# Altium PCB TRX_2.PcbDoc
Units mm, origin at the board's own origin, x right, y up, seen from the top; angles counter-clockwise.
Board outline 99.7 x 69.9 mm, 2 copper layers (Top, Bottom); 83 components, 64 nets, 277 pads, 36 vias.
Unrouted connection lines stored in the file: 1.
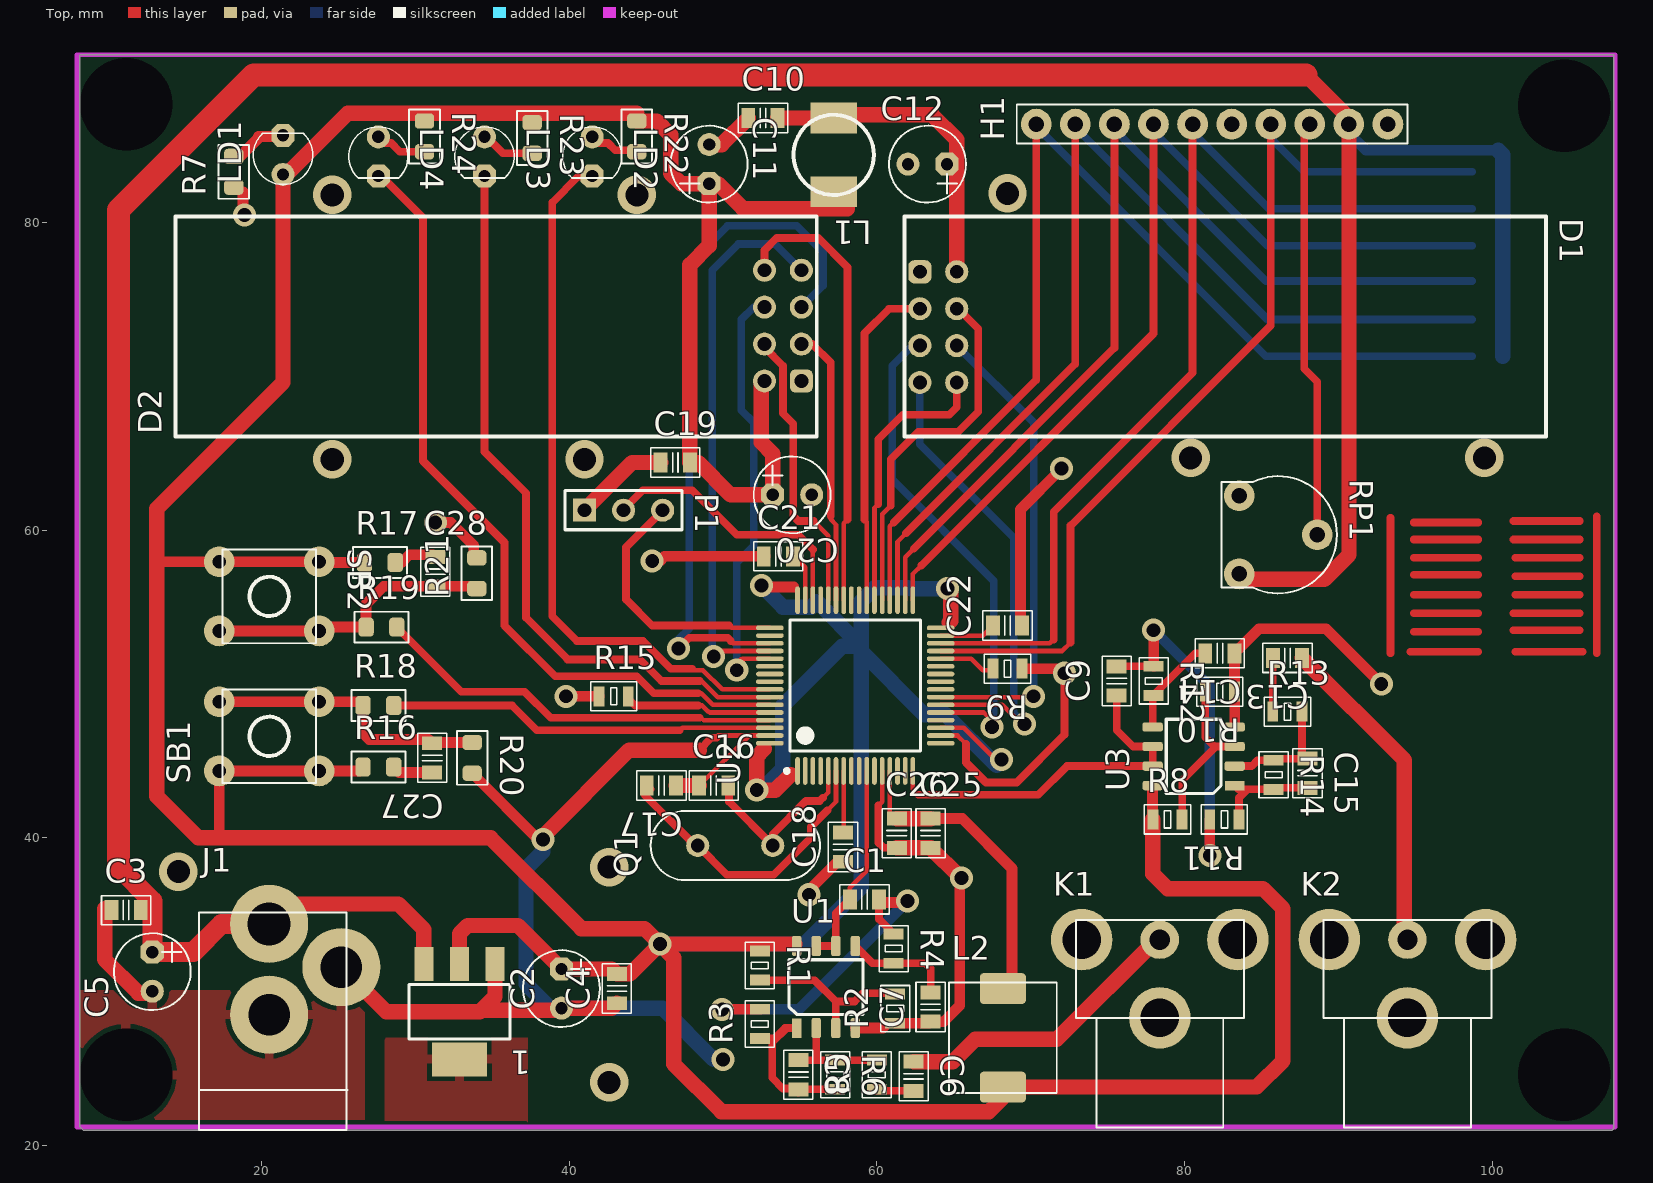
[diagram p0: Top view]
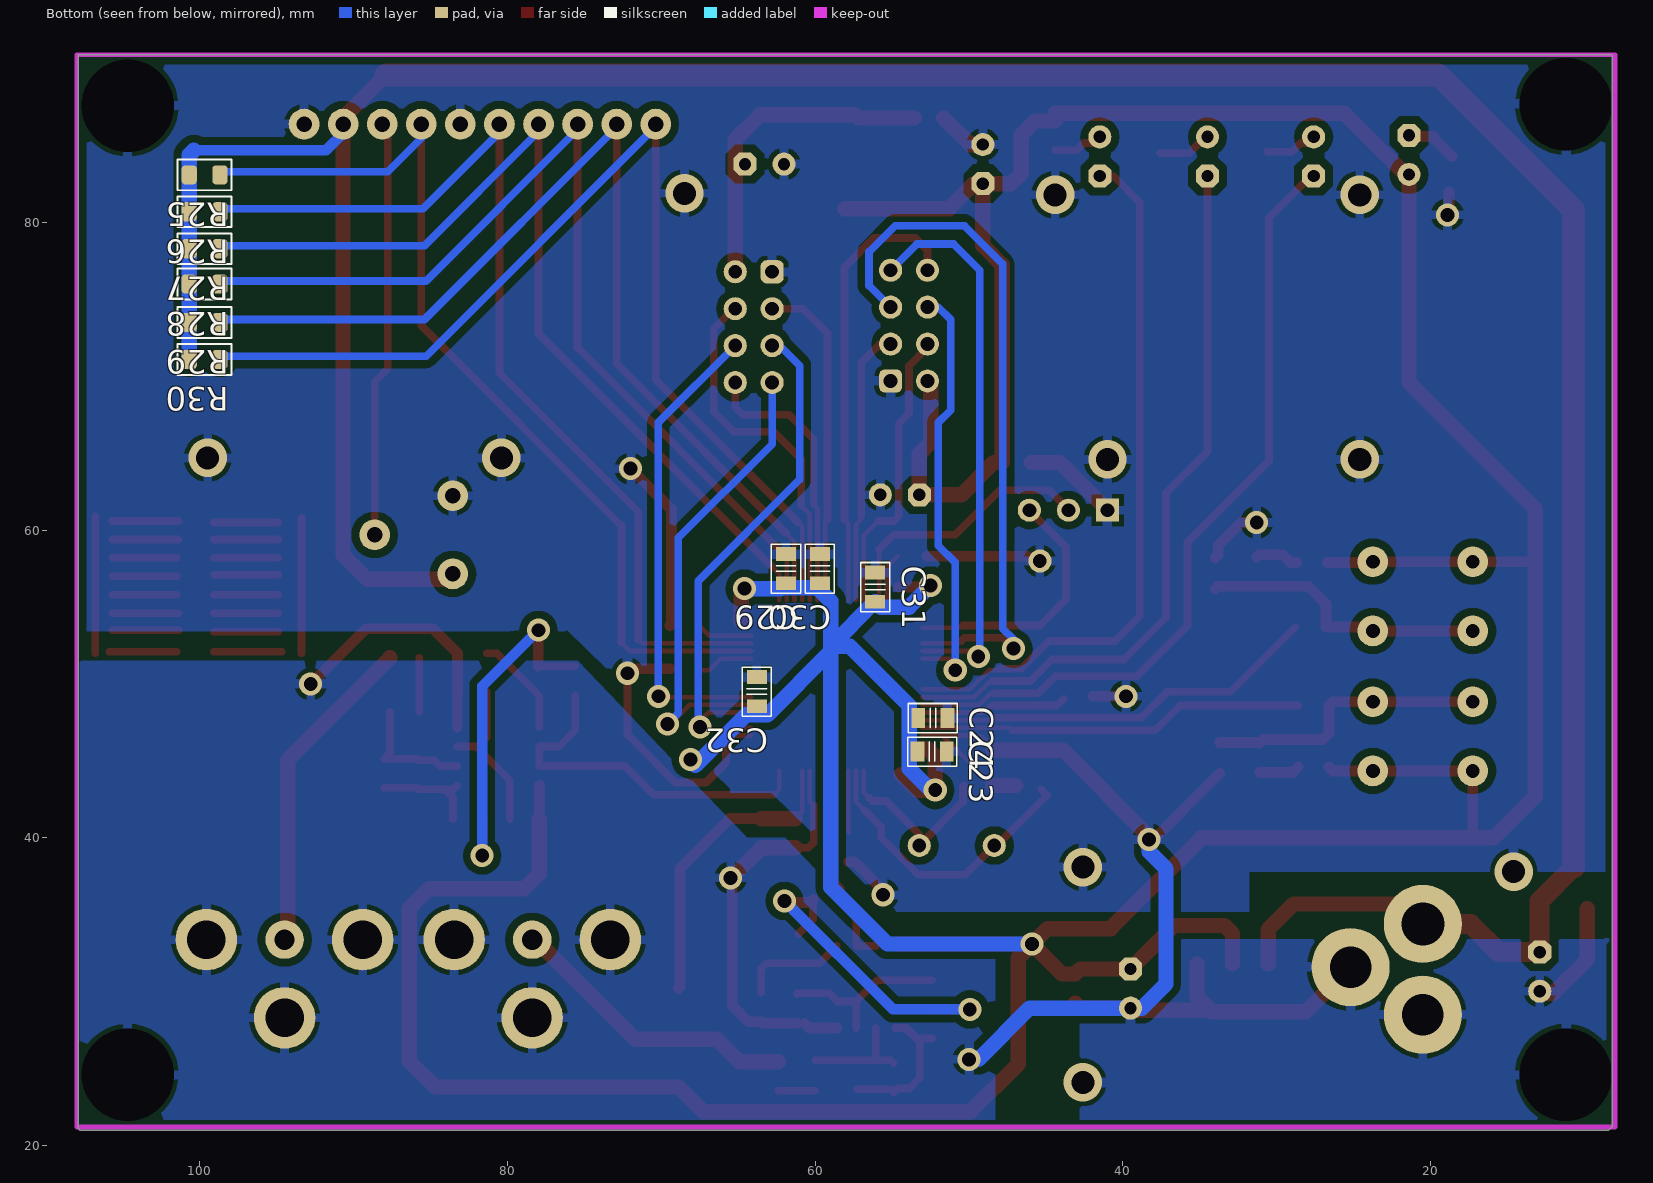
[diagram p1: Bottom view, seen from below]
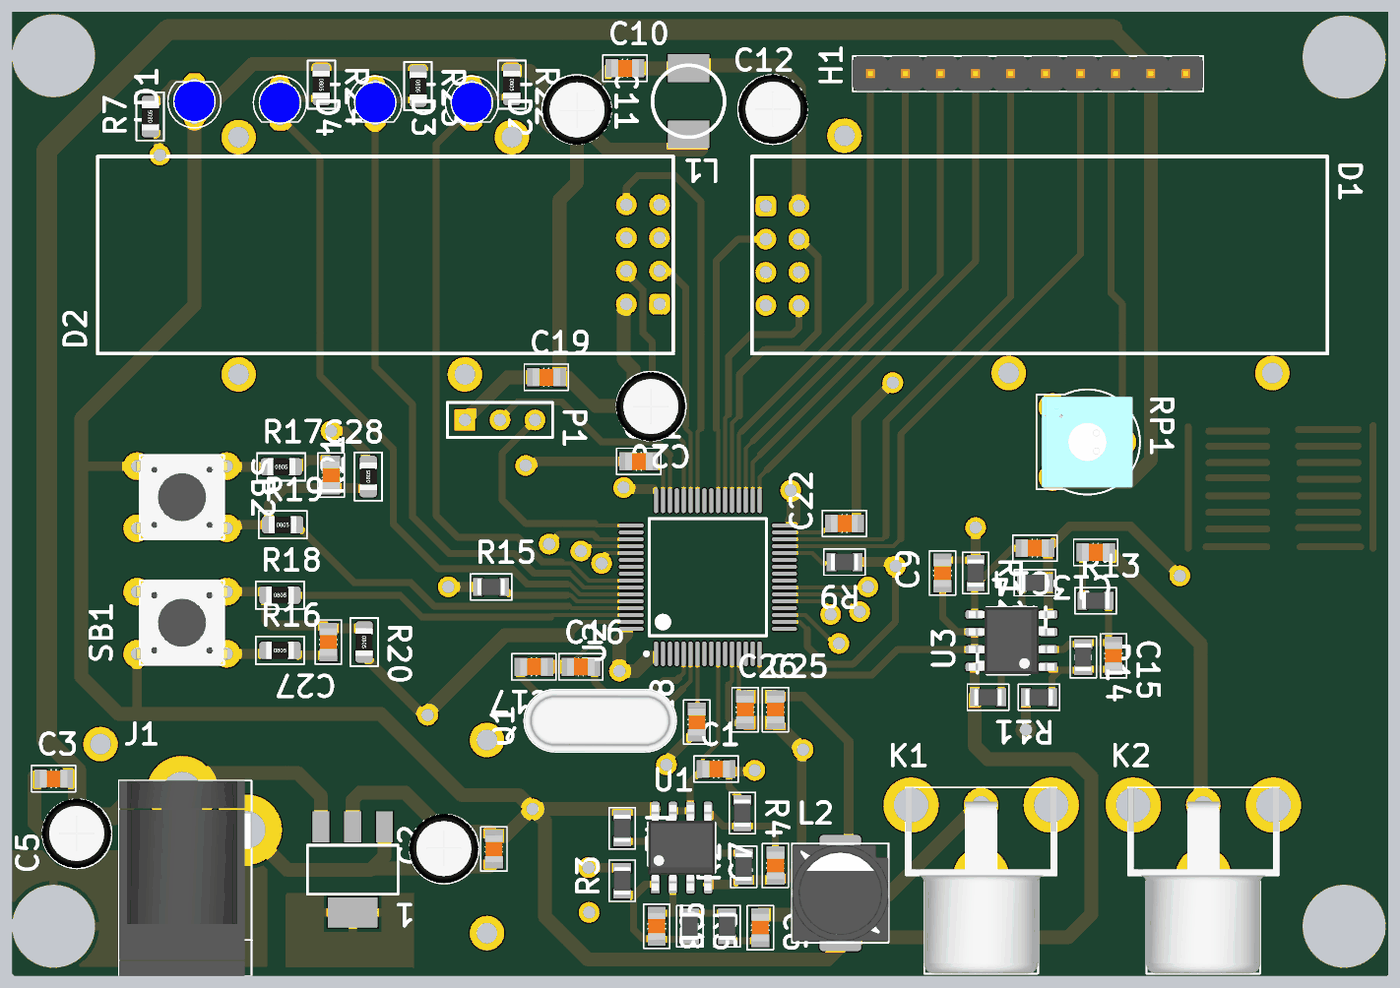
[diagram p2: 3D render of the assembled board from above, using the file's embedded part models]
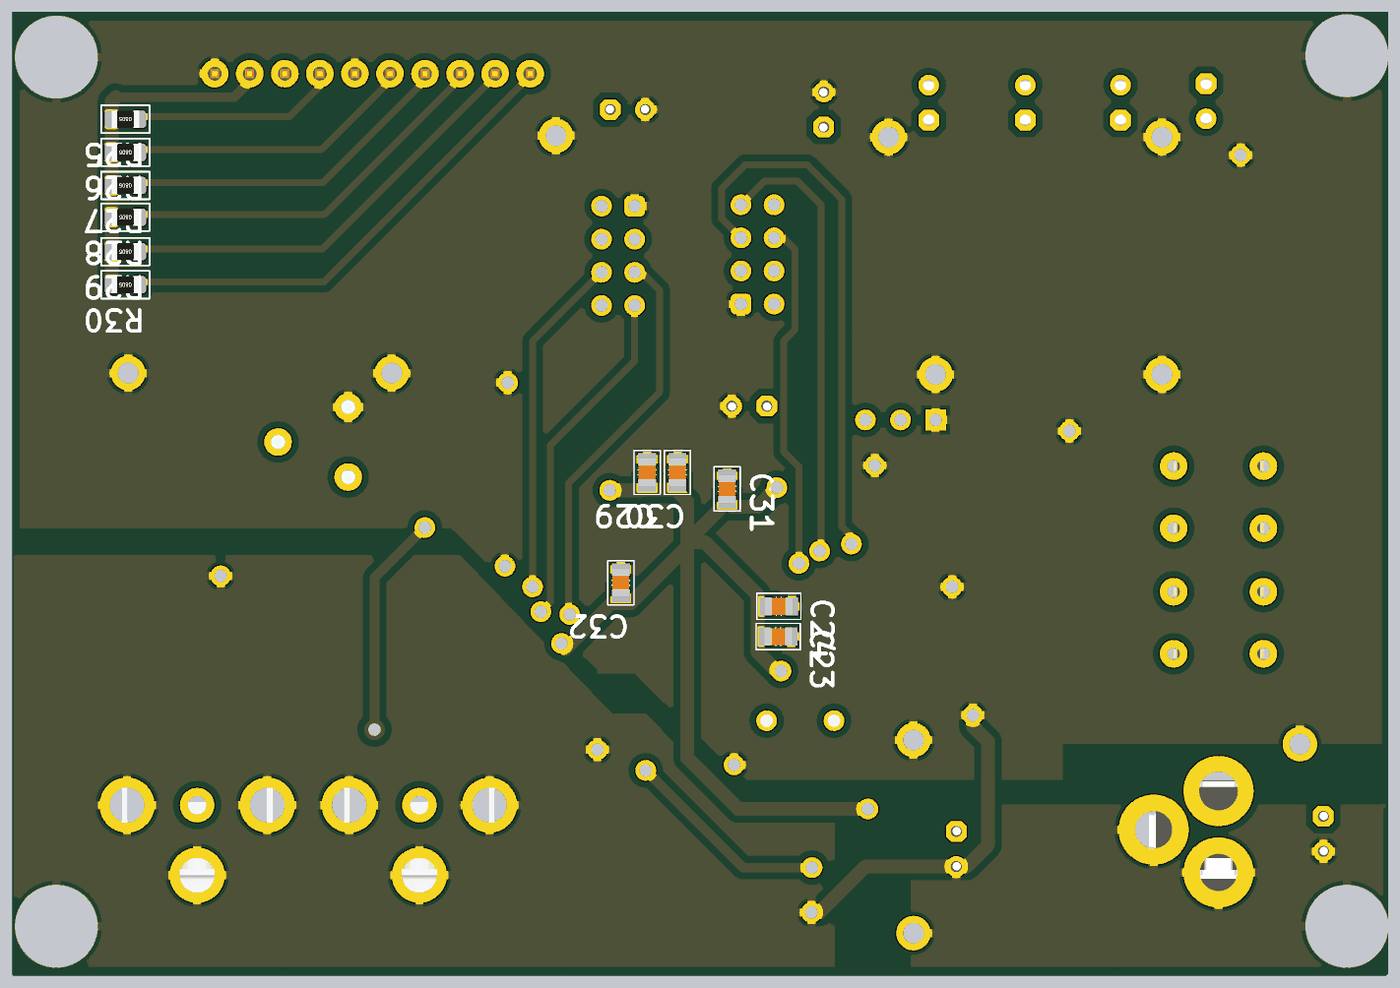
[diagram p3: 3D render of the assembled board from below, using the file's embedded part models]

## Layer stack, top to bottom
Top Solder: solder mask 0.0102, Solder Resist, Dk 3.5
Top: signal copper 0.0356
Dielectric 1: dielectric 0.32, FR-4, Dk 4.8
Bottom: signal copper 0.0356
Bottom Solder: solder mask 0.0102, Solder Resist, Dk 3.5

## Board outline
8.4,21 8.2,21.2 8.2,90.9 107.9,90.9 107.9,21.1 107.8,21 8.5,21

## Design rules (kind name [scope] priority, off if disabled: settings)
Clearance Clearance_poly_0.5 [InPolygon   And Not  InNet('VCC 3.3V')] p1: gap=0.5
Clearance Clearance_U3_0.1mm [(ObjectKind = 'Pad') And (Component = 'U2')] p2: gap=0.15
Clearance Clearance_GND_PWR_0.7mm [(InNet('GND') OR InNet('VCC 3.3V'))] p3: gap=0.2
Clearance [All] p4: gap=0.2
HoleSize [All] p1: absolutevalues=TRUE maxlimit=10 minlimit=0.025 maxpercent=80.000 minpercent=20.000
PolygonConnect [All] p1: connectstyle=Relief reliefconductorwidth=0.6 reliefentries=4 polygonreliefangle="90 Angle" airgapwidth=0.3
RoutingVias [All] p1: holewidth=0.3 width=0.5 viastyle="Through Hole" minholewidth=0.2 minwidth=0.45 maxholewidth=10 maxwidth=10
SolderMaskExpansion [All] p1: expansion=0.102
Width 3.3V_GND [(InNet('GND') OR InNet('VCC 3.3V') OR InNet('VCC 5V'))] p1: maxlimit=1.3 minlimit=0.2 preferedwidth=1
Width [All] p2: maxlimit=1.5 minlimit=0.2 preferedwidth=0.3
28 further rules are at their usual default settings.

## Components (designator, comment, footprint, x,y, rotation, side; value= is the part's Value field where it differs from the comment)
1 "AMS1117-3.3" SOT-223_AMS1117-3.3(Primary) 32.8,28.7 r180 top
C1 "100nF" C_0805 59.2,36 r0 top
C2 "100u" El-d5-h11-F2.54 39.5,30.2 r90 top
C3 "100nF" C_0805 11.2,35.3 r0 top
C4 "100nF" C_0805 43.1,30.2 r90 top
C5 "100u" El-d5-h11-F2.54 12.9,31.3 r90 top
C6 "100nF" C_0805 62.4,24.5 r270 top
C7 "100nF" C_0805 63.5,29 r90 top
C8 "100nF" C_0805 54.9,24.6 r270 top
C9 "100nF" C_0805 75.6,50.2 r90 top
C10 "100nF" C_0805 52.6,86.8 r0 top
C11 "100u" El-d5-h11-F2.54 49.1,83.8 r270 top
C12 "100u" El-d5-h11-F2.54 63.3,83.8 r0 top
C13 "100nF" C_0805 86.7,51.7 r180 top
C14 "100nF" C_0805 82.3,52 r180 top
C15 "100nF" C_0805 88,44.2 r270 top
C16 "20pF" C_0805 49.4,43.4 r0 top
C17 "20pF" C_0805 46,43.4 r180 top
C18 "100nF" C_0805 57.8,39.4 r90 top
C19 "100nF" C_0805 46.9,64.4 r0 top
C20 "100u" El-d5-h11-F2.54 54.5,62.3 r180 top
C21 "2.2uF" C_0805 53.6,58.3 r0 top
C22 "2.2uF" C_0805 68.5,53.8 r180 top
C23 "1uF" C_0805 52.4,45.6 r180 bottom
C24 "100nF" C_0805 52.358,47.784 r180 bottom
C25 "1uF" C_0805 63.5,40.3 r90 top
C26 "100nF" C_0805 61.3,40.3 r90 top
C27 "100nF" C_0805 31.1,45.2 r270 top
C28 "100nF" C_0805 31.3,57.3 r90 top
C29 "4.7uF" C_0805 61.9,57.5 r270 bottom
C30 "100nF" C_0805 59.7,57.5 r270 bottom
C31 "100nF" C_0805 56.1,56.3 r270 bottom
C32 "100nF" C_0805 63.8,49.5 r270 bottom
D1 "nrf24L01_modul" 24L01-2x4 62.8,76.8 r0 top
D2 "nrf24L01_modul" 24L01-2x4 55.1,69.7 r180 top
H1 "HD44780" J1x10 81.8,86.4 r180 top
J1 "Power-Jack" Power-Jack 20.5,20.8 r90 top
K1 "Chinch Mono-2" "Chinch Mono - 2" 78.4,28.3 r0 top
K2 "Chinch Mono-2" "Chinch Mono - 2" 94.5,28.3 r0 top
L1 "L_SMD_5mm" L_SMD_4.8 57.2,82 r180 top
L2 "33u" Dr-SD-75 68.2,27 r0 top
LD1 "Led" "Led d3mm Blue" 21.4,84.4 r90 top
LD2 "Led" "Led d3mm Blue" 41.5,84.3 r270 top
LD3 "Led" "Led d3mm Blue" 34.5,84.3 r270 top
LD4 "Led" "Led d3mm Blue" 27.6,84.3 r270 top
P1 "SWD" HDR1X3 41,61.3 r0 top
Q1 "8MHz" HC49S 50.8,39.5 r180 top
R1 "0" R_0805 52.4,31.7 r270 top
R2 "0" R_0805 61.2,28.9 r90 top
R3 "0" R_0805 52.4,27.9 r90 top
R4 "0" R_0805 61.1,32.8 r270 top
R5 "0" R_0805 60,24.6 r90 top
R6 "0" R_0805 57.3,24.6 r270 top
R7 "300" R0805 18.2,83.3 r90 top
R8 "0" R_0805 78.9,41.2 r0 top
R9 "0" R_0805 68.5,51 r180 top
R10 "0" R_0805 82.3,49.5 r180 top
R11 "0" R_0805 82.6,41.2 r180 top
R12 "0" R_0805 78,50.2 r270 top
R13 "0" R_0805 86.7,48.2 r0 top
R14 "0" R_0805 85.8,44.1 r270 top
R15 "0" R_0805 42.9,49.2 r0 top
R16 "100" R0805 27.6,44.6 r0 top
R17 "100" R0805 27.7,57.9 r0 top
R18 "330" R0805 27.6,48.6 r0 top
R19 "330" R0805 27.8,53.7 r0 top
R20 "330" R0805 33.7,45.2 r270 top
R21 "330" R0805 34,57.2 r90 top
R22 "300" R0805 44.4,85.6 r270 top
R23 "300" R0805 37.6,85.5 r270 top
R24 "300" R0805 30.6,85.6 r270 top
R25 "4.7k" R0805 99.7,83.1 r0 bottom
R26 "4.7k" R0805 99.7,80.7 r0 bottom
R27 "4.7k" R0805 99.7,78.3 r0 bottom
R28 "4.7k" R0805 99.7,76 r0 bottom
R29 "4.7k" R0805 99.7,73.5 r0 bottom
R30 "4.7k" R0805 99.7,71.1 r0 bottom
RP1 "1k" "R-Tr 6LV" 86.1,59.7 r270 top
SB1 "TS-06" TS-06 20.5,46.6 r90 top
SB2 "TS-06" TS-06 20.5,55.7 r270 top
U1 "MCP6002" SO8-150 56.7,30.3 r0 top
U2 "STM32F405RGT6" STM-LQFP64_N 58.6,49.9 r90 top
U3 "MCP6002" SO8-150 80.6,45.3 r90 top

## Footprints (in the part's own frame and the unit in brackets; to place one, negate y for a bottom-side part, rotate by r counter-clockwise, add the part's x,y. Pads: shape width x height; smd on the part's side, far side on the other; paste and mask are expansions set on the pad)
24L01-2x4 [mm]
  round 1.5 hole 0.9: 1(2.4,0) 3(0,-2.4) 4(2.4,-2.4) 5(0,-4.8) 6(2.4,-4.8) 7(0,-7.2) 8(2.4,-7.2)
  rrect50% 1.5x1.5 hole 0.9: 2(0,0)
  silkscreen extent -1,-10.7 40.7,3.6
C_0805 [mm] "Capacitor Pattern"
  rect 0.9x1.3 smd: 1(-0.95,0) 2(0.95,0)
  silkscreen extent -1.6,-0.95 1.6,0.95, body extent -1,-0.63 1,0.62, height 0.6
"Chinch Mono - 2" [mm]
  round 2.5 hole 1.321: 1(0,5.08)
  round 4 hole 2.5: 2(-5.08,5.08) 2(0,0) 2(5.08,5.08)
  silkscreen extent -5.46,-7.14 5.46,6.35, body extent -5.46,-7.14 5.46,6.35, height 12.08
Dr-SD-75 [mm] "7.3x7.3x5mm"
  rrect25% 3x2 smd: 1(0,-3.2) 2(0,3.2)
  silkscreen extent -3.5,-3.6 3.5,3.6, body extent -3.5,-3.6 3.5,3.6, height 4.51
El-d5-h11-F2.54 [mm]
  oct 1.5x1.5 hole 0.8: 1(1.27,0)
  round 1.5 hole 0.8: 2(-1.27,0)
  silkscreen extent -2.5,-2.5 2.5,2.5, body extent -2.5,-2.5 2.55,2.55, height 11.53
HC49S [mm]
  round 1.5 hole 0.9: 1(-2.44,0) 2(2.44,0)
  silkscreen extent -5.5,-2.25 5.5,2.25, body extent -5.5,-2.25 5.5,2.25, height 3.7
HDR1X3 [mm] "Connector; Header; 3 Position"
  rect 1.5x1.5 hole 0.9: 1(0,0)
  round 1.5 hole 0.9: 2(2.54,0) 3(5.08,0)
  silkscreen extent -1.27,-1.27 6.35,1.27
J1x10 [mm]
  round 2 hole 1: 1(-11.43,0) 2(-8.89,0) 3(-6.35,0) 4(-3.81,0) 5(-1.27,0) 6(1.27,0) 7(3.81,0) 8(6.35,0) 9(8.89,0) 10(11.43,0)
  silkscreen extent -12.7,-1.27 12.7,1.27, body extent -12.7,-1.27 12.7,1.27, height 10.1
L_SMD_4.8 [mm]
  rect 3x2 smd: 1(0,0) 2(0,-4.8)
  silkscreen extent -2.61,-5.01 2.6,0.21
"Led d3mm Blue" [mm]
  round 1.5 hole 0.8: 1(-1.27,0)
  oct 1.5x1.5 hole 0.8: 2(1.27,0)
  silkscreen extent -1.92,-1.92 1.4,1.92, body extent -1.57,-1.55 1.57,1.55, height 7.36
Power-Jack [mm]
  round 5.08 hole 2.7: 1(7.7,0) 2(10.8,-4.7)
  round 5.08 hole 2.8: 3(13.6,0)
  silkscreen extent 0.2,-5.08 14.35,4.57, body extent 0.2,-5.03 14.35,4.55, height 11.05
R0805 [mm]
  rrect50% 1x1.25 smd: 1(-1,0) 2(1,0)
  silkscreen extent -1.75,-1 1.75,1, body extent -1,-0.62 1,0.63, height 0.6
"R-Tr 6LV" [mm]
  round 2 hole 1: 1(-2.54,-2.54) 2(0,2.54) 3(2.54,-2.54)
  silkscreen extent -3.81,-3.68 3.81,3.81, body extent -3.3,-3.3 3.3,3.3, height 4.74
R_0805 [mm] "Resistor Pattern"
  rect 0.7x1.3 smd: 1(-0.95,0) 2(0.95,0)
  silkscreen extent -1.5,-0.95 1.5,0.95, body extent -1,-0.6 1,0.6, height 0.5
SO8-150 [mil]
  rect 24x50 smd mask+4: 1(-75,-105)
  rrect50% 24x52 smd mask+4: 2(-25,-105) 3(25,-105) 4(75,-105) 5(75,105) 6(25,105) 7(-25,105) 8(-75,105)
  silkscreen extent -95,-70 95,70, body extent -95,-122 95,122, height 67
SOT-223_AMS1117-3.3(Primary) [mm]
  rect 1.219x2.235 smd paste-25.4 mask-25.4: 1(-2.381,-3.099) 2(-0.07,-3.099) 3(2.241,-3.099)
  rect 3.6x2.2 smd paste-25.4 mask-25.4: 2(-0.07,3.099)
  silkscreen extent -3.35,-1.78 3.21,1.78
STM-LQFP64_N [mm] "Thin QFP, 64-Leads, Body 10x10mm, Pitch 0.5mm, IPC Medium Density"
  oval 1.8x0.3 smd: 1(-5.55,3.75) 2(-5.55,3.25) 3(-5.55,2.75) 4(-5.55,2.25) 5(-5.55,1.75) 6(-5.55,1.25) 7(-5.55,0.75) 8(-5.55,0.25) 9(-5.55,-0.25) 10(-5.55,-0.75) 11(-5.55,-1.25) 12(-5.55,-1.75) 13(-5.55,-2.25) 14(-5.55,-2.75) 15(-5.55,-3.25) 16(-5.55,-3.75) 33(5.55,-3.75) 34(5.55,-3.25) 35(5.55,-2.75) 36(5.55,-2.25) 37(5.55,-1.75) 38(5.55,-1.25) 39(5.55,-0.75) 40(5.55,-0.25) 41(5.55,0.25) 42(5.55,0.75) 43(5.55,1.25) 44(5.55,1.75) 45(5.55,2.25) 46(5.55,2.75) 47(5.55,3.25) 48(5.55,3.75)
  oval 0.3x1.8 smd: 17(-3.75,-5.55) 18(-3.25,-5.55) 19(-2.75,-5.55) 20(-2.25,-5.55) 21(-1.75,-5.55) 22(-1.25,-5.55) 23(-0.75,-5.55) 24(-0.25,-5.55) 25(0.25,-5.55) 26(0.75,-5.55) 27(1.25,-5.55) 28(1.75,-5.55) 29(2.25,-5.55) 30(2.75,-5.55) 31(3.25,-5.55) 32(3.75,-5.55) 49(3.75,5.55) 50(3.25,5.55) 51(2.75,5.55) 52(2.25,5.55) 53(1.75,5.55) 54(1.25,5.55) 55(0.75,5.55) 56(0.25,5.55) 57(-0.25,5.55) 58(-0.75,5.55) 59(-1.25,5.55) 60(-1.75,5.55) 61(-2.25,5.55) 62(-2.75,5.55) 63(-3.25,5.55) 64(-3.75,5.55)
  silkscreen extent -5.67,-4.25 4.25,4.57, body extent -5,-5 5,5, height 1.6
TS-06 [mm]
  round 2 hole 0.9: 1(-2.25,3.25) 1(-2.25,-3.25) 2(2.25,3.25) 2(2.25,-3.25)
  silkscreen extent -3.05,-3.05 3.05,3.05, body extent -3,-3.3 3,3.3, height 3.95

## Part data
C1 C3 C4 C6 C7 C8 C9 C10 C13 C14 C15 C16 C17 C18 C19 C21 C22 C23 C24 C25 C26 C27 C28 C29 C30 C31 C32: library part C0805, "Capacitor"
C2 C5 C11 C12 C20: library part 10u-35V, "35V"
H1: library part H-1x10
L2: library part "L-SD-75 33uH", "1.2A 0.15om 7.3x7.3x5mm"
LD1 LD2 LD3 LD4: library part "Led 3mm Blue", "3mm"
P1: library part "Header 3", "Header, 3-Pin"
Q1: library part Q
R1 R2 R3 R4 R5 R6 R8 R9 R10 R11 R12 R13 R14 R15: library part R0805, "Resistor"
R7 R16 R17 R18 R19 R20 R21 R22 R23 R24 R25 R26 R27 R28 R29 R30: library part R-0805, "SMD 0805 0.1W 5% 150V"
RP1: library part "R-Tr 6LV", "Тример 0,15W 6mm Вер. Piner"
SB1 SB2: library part "Buton TS-06"
U1 U3: library part MCP6072, "CMOS 0.15mV 1.2MHz R/R In/Out 110uA"
U2: "ARM Cortex-M4 32-bit MCU+FPU, 210 DMIPS, 1024 kB Flash, 192 kB Internal RAM, 51 I/Os, 64-pin LQFP, -40 to 85 degC, Tray"

## Free pads (board coordinates)
  round 0 hole 6: 0(11.2,87.7) 1(11.2,24.6) 2(104.7,87.6)
  round 2 hole 6: 3(104.7,24.6)

## Via types
v1: diameter 1.5, hole 0.9, Top to Bottom, 26 vias
v2: diameter 2.5, hole 1.5, Top to Bottom, 10 vias

## Nets (pads, with @x,y where several pads share a name; then routed paths per layer and width w, separated by ;. In a path a pad name is that pad's centre, name@x,y a point inside that pad or via, vN(x,y) a via of type N, cw(c..) or ccw(c..) an arc to the next point about the centre after c; other vN are vias at no path point)
CE: D1.3 U2.39 | length 21.7
  Top w0.3: 59.2,60.7 59.35,60.55 U2.39
  Top w0.5: 59.2,60.7 59.2,72.8 60.8,74.4 D1.3
CE2: D2.3 U2.43 | length 17.8
  Top w0.3: 57,60.7 57.35,60.35 U2.43
  Top w0.5: D2.3 55.8,72.1 57,70.9 57,60.9
CSN: D1.4 U2.37 | length 23.7
  Top w0.3: U2.37 60.35,61.05 60.9,61.6
  Top w0.5: 60.9,61.6 60.9,64.6 62.7,66.4 65.3,66.4 66.6,67.7 66.6,73.1 65.3,74.4 D1.4
CSN2: D2.4 U2.44 | length 19
  Top w0.3: 55.9,60.6 56.85,59.65 U2.44
  Top w0.5: D2.4 52.7,71.9 53.9,70.7 53.9,67.6 54.57,66.93 54.57,60.93 54.9,60.6 55.9,60.6
D4: H1.7 R27.1 U2.33 | length 61.4
  Top w0.3: U2.33 62.35,57.15 62.9,57.7
  Top w0.5: 62.9,57.7 77.99,72.79 H1.7@77.99,86.6
  Bottom w0.5: H1.7@78.2,86 78.2,85.7 85.4,78.5 R27.1@98.7,78.5
D5: H1.8 R28.1 U2.34 | length 64.6
  Top w0.3: U2.34 61.85,58.25 62.4,58.8
  Top w0.5: 62.4,58.8 75.45,71.85 H1.8@75.45,86.7
  Bottom w0.5: H1.8@75.3,86.4 75.3,86.2 85.3,76.2 R28.1@98.7,76.2
D6: H1.9 R29.1 U2.35 | length 67.4
  Top w0.3: U2.35 61.35,59.25 61.9,59.8
  Top w0.5: 61.9,59.8 72.91,70.81 H1.9@72.91,86.6
  Bottom w0.5: H1.9@72.65,86.55 72.65,86.45 85.4,73.7 R29.1@98.7,73.7
D7: H1.10 R30.1 U2.36 | length 69.4
  Top w0.3: U2.36 60.85,60.25 61.1,60.5
  Top w0.5: 61.1,60.5 70.37,69.77 H1.10@70.37,86.5
  Bottom w0.5: H1.10@70.45,86.15 85.3,71.3 R30.1@98.7,71.3
E: H1.6 R26.1 U2.30 | length 65.4
  Top w0.3: U2.30 71.25,52.65 71.5,52.9
  Top w0.5: 71.5,52.9 71.5,61.2 80.53,70.23 H1.6@80.53,86.6
  Bottom w0.5: H1.6@80.3,86.1 85.5,80.9 R26.1@98.7,80.9
GND: 1.1 C2.2 C3.1 C4.1 C5.2 C7.1 C10.1 C11.2 C12.2 C14.1 C16.1 C17.1 C18.1 C19.1 C20.2 C21.1 C22.1 C23.2 C24.2 C25.1 C26.1 C29.1 C30.1 C31.1 C32.1 D1.2 D2.2 H1.1 H1.5 J1.1 J1.2 K1.2 K2.2 P1.1 pad.0 pad.1 pad.2 pad.3 R2.1 R7.1 R9.1 R10.1 R15.1 R20.2 R21.2 RP1.1 U1.4 U2.12 U2.18 U2.63 U3.4 | length 184.3
  Top w0.3: C16.1 51.7,46.65 ; 49.65,46.65 51.7,46.65 ; U2.63 51.7,46.65 ; 60.1,42.1 60.35,42.35 U2.12 ; U2.18 65.25,46.65 65.8,46.1
  Top w0.5: 48.45,45.7 49.25,46.5 49.6,46.5 ; 60.1,42.1 60.1,39.7 60.45,39.35 C26.1 ; 65.8,46.1 65.8,44.9 67.1,43.6 69.1,43.6 72.2,46.7 v1(72.2,50.7)
  Top w0.7: v1@18.8,80.5 R7.1@18.8,82 ; v1@31.6,60.5 32.3,60.5 33.8,59 33.8,58.4 R21.2 ; R20.2 38,39.9 v1(38.3,39.9) ; v1@39.9,49.2 R15.1 ; v1@45.9,58 46.2,58.3 C21.1@52.75,58.3 ; v1@55.5,36.3 v1(55.6,36.3) ; v1@55.6,36.6 57.45,38.45 C18.1 ; U1.4 60.383,27.633 R2.1@60.675,27.925 ; R2.1 63.4,27.95 C7.1 64.35,28.05 65.4,29.1 v1@65.4,37.4 ; R9.1 71.9,51 v1(72.2,50.7) ; C22.1 69.35,53.9 69.35,61.35 v1(72,64) ; U3.4 83.267,49.483 R10.1 C14.1 84.85,53.6 89.2,53.6 v1@92.7,50.1
  Top w1: C3.1@9.8,35.4 9.8,32.1 12,29.9 C5.2@13,29.9 ; J1.2 28.1,28.7 34.2,28.7 34.3,28.8 ; 1.1 35.181,29.681 34.3,28.8 ; v1(38.3,39.9) 38.3,40.1 43.9,45.7 48.45,45.7 ; P1.1 44.1,64.4 C19.1 ; C4.1 42.78,28.93 C2.2 39.37,28.8 34.3,28.8 ; C17.1 C16.1 ; C11.2 49.92,85.07 C10.1 ; C26.1 C25.1 65.4,37.45 v1@65.4,37.4
  Bottom w1: J1.2 J1.2@25.6,31.2 ; v1(38.3,39.9) 38.3,39.1 37.2,38 37.2,30.5 38.77,28.93 C2.2 46.07,28.93 49.4,25.6 v1(50,25.6)
  other v1: 65.5,37.4 39.8,49.2 92.8,50 45.4,58 31.3,60.5 18.9,80.5
  other v2: 42.6,24.1 14.6,37.8 42.6,38.1 24.6,64.6 41,64.6 80.4,64.7 99.5,64.7 24.6,81.8 44.4,81.8 68.5,81.9
IRQ: D1.8 U2.38 | length 18.1
  Top w0.3: U2.38 59.85,61.45 60.1,61.7
  Top w0.5: 60.1,61.7 60.1,65.9 61.7,67.5 64.7,67.5 65.2,68 D1.8
IRQ2: D2.8 U2.42 | length 29.6
  Top w0.3: U2.42 57.85,60.45 58.1,60.7
  Top w0.5: D2.8 52.7,78.2 53.5,79 56.2,79 58.1,77.1 58.1,60.7
LED1: LD2.2 U2.57 | length 46.2
  Top w0.3: 48.1,50.9 48.7,50.9 49.95,49.65 U2.57
  Top w0.5: LD2.2@41.5,83 40.6,83 38.9,81.3 38.9,54.4 40.5,52.8 44.8,52.8 46.6,51 48,51
LED2: LD3.2 U2.58 | length 47.7
  Top w0.3: 48.65,50.15 49.65,49.15 U2.58
  Top w0.5: LD3.2 34.5,65.1 37.2,62.4 37.2,54.3 39.9,51.6 44.6,51.6 46,50.2 48.5,50.2
LED3: LD4.2 U2.59 | length 52.2
  Top w0.3: 48.6,49.4 49.35,48.65 U2.59
  Top w0.5: LD4.2@27.45,83.35 30.5,80.3 30.5,64.5 35.8,59.2 35.8,53.8 39.1,50.5 44.4,50.5 45.5,49.4 48.4,49.4
MISO: D1.7 U2.22 | length 30.9
  Top w0.3: U2.22 68.15,48.65 v1@69.45,47.35
  Bottom w0.5: D1.7 62.8,65.6 68.9,59.5 68.9,48.1 v1(69.6,47.4)
MISO2: D2.7 U2.52 | length 35.7
  Top w0.3: v1@49.8,52.15 U2.52
  Bottom w0.5: v1@49.3,51.7 49.3,76.9 51,78.6 53.4,78.6 D2.7
  other v1: 49.4,51.8
MOSI: D1.6 U2.23 | length 30.8
  Top w0.3: U2.23 70.15,49.15 v1(70.2,49.2)
  Bottom w0.5: D1.6 70.2,67 v1@70.2,49.3
MOSI2: D2.6 U2.53 | length 28.4
  Top w0.3: 51.25,51.65 U2.53
  Top w0.5: v1(50.9,50.9) 50.6,50.9 v1@51.2,51.5
  Bottom w0.5: v1(50.9,50.9) 50.9,57.9 52,59 52,67 51.2,67.8 51.2,73.7 52,74.5 D2.6
MOUT1: C9.1 U2.16 U3.6 U3.7 | length 24
  Top w0.3: U2.16 62.35,43.15 62.7,42.8
  Top w0.5: 62.7,42.8 70.5,42.8 72.365,44.665 U3.7 U3.6 76.665,45.935 75.6,47 C9.1
MOUT2: C1.1 U1.6 U1.7 U2.10 | length 13.5
  Top w0.3: C1.1 58.25,36.75 59.35,37.85 U2.10
  Top w0.5: U1.7 U1.6 57.335,35.085 C1.1
NetC1_2: C1.2 R3.2 R4.1 | length 21.8
  Top w0.5: C1.2 60.15,34.7 R4.1
  Top w0.7: v1@49.9,28.9 v1(49.95,28.85) R3.2 ; C1.2 60.35,35.8 v1@61.7,35.8
  Bottom w0.7: v1(49.95,28.85) 54.95,28.85 v1(62,35.9)
NetC6_1: C6.1 K1.1 | length 19.2
  Top w1: C6.1 64.95,25.45 66.4,26.9 71.7,26.9 K1.1@78.3,33.5
NetC6_2: C6.2 R5.1 | length 2.4
  Top w0.5: R5.1@60,23.55 C6.2
NetC7_2: C7.2 R4.2 U1.5 | length 7.1
  Top w0.5: U1.5 59.722,31.85 R4.2 63.15,31.85 63.5,31.5 C7.2
NetC8_1: C8.1 R5.2 R6.1 U1.2 | length 7.3
  Top w0.5: C8.1@54.9,25.35 55.1,25.55 56,25.55 ; U1.2 56.065,25.615 56,25.55 ; R5.2 R6.1 56,25.55
NetC8_2: C8.2 R3.1 R6.2 U1.1 | length 11.5
  Top w0.5: R3.1 53.35,26.95 54.033,27.633 U1.1 54.133,27.633 53.2,26.7 53.2,24.4 53.9,23.7 54.65,23.7 54.9,23.45 55.1,23.65 R6.2
NetC9_2: C9.2 R11.2 R12.1 | length 23.4
  Top w0.5: C9.2 R12.1
  Top w0.7: R12.1 v1(78,53.5) v1@78,53.6 ; R11.2 v1(81.65,38.85) v1@81.7,38.8
  Bottom w0.7: v1(78,53.5) 81.65,49.85 v1(81.65,38.85)
NetC10_2: C10.2 C12.1 D1.1 L1.2 | length 20.7
  Top w1: C10.2 L1.2 ; L1.2@57.4,87 63.6,87 65.2,85.4 D1.1
NetC13_1: C13.1 K2.1 | length 20.6
  Top w1: C13.1 94.3,45.05 94.3,34.4 K2.1@94.7,34
NetC13_2: C13.2 R13.1 | length 3.5
  Top w0.5: R13.1 C13.2
NetC14_2: C14.2 R12.2 U3.5 | length 6.6
  Top w0.5: U3.5@77.928,47.2 U3.5 77.933,49.233 80.7,52 C14.2
NetC15_1: C15.1 R13.2 R14.1 U3.2 | length 8.1
  Top w0.5: U3.2 84.365,44.665 84.75,45.05 R14.1 85.9,45.15 C15.1 87.65,45.5 R13.2
NetC15_2: C15.2 R11.1 R14.2 U3.1 | length 7.1
  Top w0.5: U3.1 83.512,43.15 84.1,43.15 ; R11.1 83.55,42.6 84.1,43.15 ; C15.2 85.9,43.25 R14.2 84.1,43.15
NetC16_2: C16.2 Q1.1 U2.5 | length 12
  Top w0.3: 56.5,42.6 56.85,42.95 U2.5
  Top w0.5: C16.2 50.4,43.35 50.4,42.34 Q1.1 53.24,40.24 55.4,42.4 56.3,42.4 56.5,42.6
NetC17_2: C17.2 Q1.2 U2.6 | length 19.5
  Top w0.3: 56.8,41.8 57.35,42.35 U2.6
  Top w0.5: C17.2@45.3,43.15 44.925,42.775 48.2,39.5 Q1.2 50.26,37.6 53.3,37.6 55.7,40 55.7,40.7 56.8,41.8
NetC18_2: C18.2 U2.7 | length 4
  Top w0.3: C18.2 57.85,40.4 U2.7
NetC21_2: C21.2 U2.47 | length 3.1
  Top w0.3: C21.2@54.65,58.3 55.35,57.6 U2.47
NetC22_2: C22.2 U2.31 | length 3.7
  Top w0.3: U2.31 66.9,53.15 C22.2
NetC25_2: C25.2 C26.2 L2.2 U2.13 | length 20
  Top w0.3: U2.13 60.85,41.7 C26.2
  Top w0.7: C25.2 65.55,41.25 68.8,38 68.8,30.3 L2.2@68.9,30.2
  Top w1: C26.2 C25.2
NetC27_1: C27.1 R18.1 R20.1 SB1.2 | length 18.6
  Top w0.7: SB1.2@17.25,48.85 23.75,48.85 26.35,48.85 R18.1 26.6,46.8 27,46.4 30.85,46.4 C27.1 31.15,46.2 R20.1
NetC27_2: C27.2 R16.2 | length 2.6
  Top w0.7: R16.2 28.95,44.25 C27.2
NetC28_1: C28.1 R19.1 R21.1 SB2.2 | length 18.9
  Top w0.7: SB2.2@17.25,53.45 23.75,53.45 24,53.7 R19.1 26.8,55.2 27.95,56.35 C28.1 33.85,56.35 R21.1
NetC28_2: C28.2 R17.2 | length 2.9
  Top w0.7: R17.2 29.1,57.9 29.6,58.4 31.15,58.4 C28.2
NetH1_3: H1.3 RP1.2 | length 27
  Top w0.5: H1.3@87.8,86.4 87.8,70.5 88.64,69.66 RP1.2
NetLD1_2: LD1.2 R7.2 | length 3.5
  Top w0.7: R7.2@18.6,84.3 19.8,85.5 ; 19.8,85.6 20.23,85.6 LD1.2@21.6,85.6
NetLD2_1: LD2.1 R22.2 | length 3.1
  Top w0.5: LD2.1@41.5,85.17 42.53,85.17 43,84.7 R22.2@44.4,84.7
NetLD3_1: LD3.1 R23.2 | length 3.4
  Top w0.5: LD3.1@34.5,85.17 35.03,85.17 35.7,84.5 R23.2
NetLD4_1: LD4.1 R24.2 | length 3.2
  Top w0.5: LD4.1@27.6,85.17 28.43,85.17 29,84.6 R24.2
NetR1_2: R1.2 R2.2 U1.3 | length 11.3
  Top w0.5: R1.2 55.95,30.75 57.335,29.365 ; U1.3 57.335,29.365 ; R2.2 61.15,29.9 59.1,29.9 58.565,29.365 57.335,29.365
NetR8_2: R8.2 R10.2 U3.3 | length 10.7
  Top w0.5: R8.2 79.85,43.75 82,45.9 ; R10.2 81.35,46.55 82,45.9 ; U3.3 82.035,45.935 82,45.9
NetR9_2: R9.2 U2.28 | length 3.8
  Top w0.3: U2.28 66.15,51.65 66.9,50.9 67.45,50.9 R9.2
NetR15_2: R15.2 U2.60 | length 9.3
  Top w0.3: 48.648,48.6 49.048,48.2 49.1,48.2 49.15,48.15 U2.60
  Top w0.5: R15.2@43.85,49.05 44.3,48.6 48.4,48.6
PB8: R19.2 U2.61 | length 26.7
  Top w0.254: 48.6,47.8 48.75,47.65
  Top w0.3: 48.75,47.65 U2.61
  Top w0.5: R19.2 33,49.5 37.1,49.5 38.8,47.8 48.5,47.8
PB9: R18.2 U2.62 | length 25
  Top w0.3: 47.35,47.15 U2.62
  Top w0.5: R18.2 36.3,48.6 37.9,47 47.2,47
RS: H1.4 R25.1 U2.29 | length 62.5
  Top w0.3: U2.29 72.05,52.15 72.6,52.7
  Top w0.5: 72.6,52.7 72.6,60.3 85.61,73.31 H1.4
  Bottom w0.5: H1.4@85.51,86.19 85.51,85.59 87.8,83.3 R25.1@98.7,83.3
SCK: D1.5 U2.21 | length 32.2
  Top w0.3: U2.21 66.95,48.15 v1@67.5,47.6
  Bottom w0.5: D1.5 62.3,72 61,70.7 61,63.3 67.6,56.7 v1@67.6,47.2
  other v1: 67.5,47.2
SCK2: D2.5 U2.51 | length 46.8
  Top w0.3: 50.5,52.8 50.65,52.65 U2.51
  Top w0.5: v1@47.6,52.3 v1(47.1,52.3) 47.8,53 50.3,53 50.5,52.8
  Bottom w0.5: v1(47.1,52.3) 47.1,52.9 47.8,53.6 47.8,77.3 50.3,79.8 54.8,79.8 56.5,78.1 56.5,75.9 D2.5
SWCLK: P1.3 U2.49 | length 17.1
  Top w0.3: 50.4,53.8 50.55,53.65 U2.49
  Top w0.5: P1.3@46.2,61.4 43.7,58.9 43.7,55.5 45.4,53.8 50.4,53.8
SWDAT: P1.2 U2.46 | length 17.9
  Top w0.3: U2.46 55.85,58.75
  Top w0.5: P1.2@43.32,61.52 43.72,61.52 44.8,62.6 48,62.6 50.9,59.7 54.9,59.7 55.85,58.75
V+: 
V-: 
"VCC 3.3V": 1.2 C2.1 C4.2 C11.1 C19.2 C20.1 C23.1 C24.1 C29.2 C30.2 C31.2 C32.2 D2.1 L1.1 L2.1 LD1.1 R1.1 R8.1 R16.1 R17.1 R22.1 R23.1 R24.1 SB1.1 SB2.1 U1.8 U2.1 U2.19 U2.32 U2.48 U2.64 U3.8 | length 372.7
  Top w0.3: U2.19 65.65,47.15 67.8,45 67.8,44.7 68.1,45 v1(68.1,45.1)
  Top w0.7: 13.2,57.8 13.35,57.95 17.25,57.95 23.75,57.95 23.8,57.9 R17.1 ; 17.4,40 17.25,40.15 17.25,44.35 23.75,44.35 26.35,44.35 R16.1 ; v1@52.7,56.3 54.6,56.3 ; U3.8 77.933,41.217 R8.1
  Top w1: LD1.1 21.4,69.6 13.2,61.4 13.2,57.8 13.2,42.7 15.9,40 17.4,40 34.9,40 40.8,34.1 44.9,34.1 v1(45.9,33.1) ; LD1.1@21.55,83.05 25.6,87.1 44.4,87.1 ; 1.2@32.87,31.799 32.87,33.77 33.4,34.3 36.67,34.3 C2.1 42.78,31.47 C4.2 43.95,31.15 v1(45.9,33.1) ; R22.1 45.7,86.6 46.6,85.7 46.6,83.2 47.27,82.53 C11.1 ; 52.7,45.8 52.2,45.3 v1(52.2,43.1) 53.4,43.1 54.4,44.1 ; D2.1 52.5,69.5 52.5,65.7 53.23,64.97 C20.1 50.5,62.3 48.4,64.4 C19.2 47.85,77.25 49.1,78.5 C11.1 ; U1.8@54.662,33.1 v1(45.9,33.1) ; 58.1,80.9 51.3,80.9 49.67,82.53 C11.1 ; v1(64.6,56.2) 64.8,56.2 64.8,54.1 64.7,54 ; R8.1 77.95,37.65 78.9,36.7 85.1,36.7 86.4,35.4 86.4,25.5 84.7,23.8 68.9,23.8 67.3,22.2 49.9,22.2 46.8,25.3 46.8,32.2 v1(45.9,33.1)
  Bottom w1: v1(45.9,33.1) 55.3,33.1 59,36.8 59,52.1 ; v1@52.1,43 v1(52.2,43.1) 52.5,43.1 53.9,44.5 53.9,48.6 57.75,52.45 59,52.45 ; v1(52.5,56.4) 53.9,55 55.75,55 C31.2 59,52.45 ; v1(64.6,56.2) 62.25,56.2 62,56.25 59.85,56.25 59,55.4 59,52.45 ; v1(68.1,45.1) 68.1,45 67.8,44.7 64.5,48 63.1,48 59,52.1 ; 59,52.1 59,52.45
"VCC 5V": 1.3 C3.2 C5.1 H1.2 J1.3 R25.2 R26.2 R27.2 R28.2 R29.2 R30.2 RP1.3 | length 216.5
  Top w1: J1.3 21.8,35.7 28.9,35.7 30.559,34.041 1.3 ; RP1.3 83.92,56.8 89.1,56.8 90.7,58.4 90.7,86.8 87.9,89.6
  Top w1.3: 10.7,38.1 12.9,35.9 C5.1 15.57,32.57 17.4,34.4 J1.3
  Top w1.5: 10.7,38.1 10.7,80.8 19.5,89.6 87.9,89.6
  Bottom w0.7: H1.2@90.59,85.91 91.8,84.7 100.4,84.7
  Bottom w1: H1.2@90.59,85.91 H1.2@90.59,86.4 ; 100.4,84.7 100.7,84.4 100.7,83.3 100.7,80.9 100.7,78.5 100.7,76.2 100.7,73.7 R30.2@100.7,71.3
pads on no net: U2.2 U2.3 U2.4 U2.8 U2.9 U2.11 U2.14 U2.15 U2.17 U2.20 U2.24 U2.25 U2.26 U2.27 U2.40 U2.41 U2.45 U2.50 U2.54 U2.55 U2.56
copper on no net: | length 85.7
  Top w0.5: 93.4,52 93.4,60.8 ; 94.7,52.1 99.1,52.1 ; 94.9,53.4 99.1,53.4 ; 94.9,54.6 99.1,54.6 ; 94.9,55.8 99.1,55.8 ; 94.9,57.1 99.1,57.1 ; 94.9,58.2 99.1,58.2 ; 94.9,59.4 99.1,59.4 ; 94.9,60.5 99.1,60.5 ; 101.4,53.5 105.7,53.5 ; 101.4,54.6 105.7,54.6 ; 101.4,59.4 105.7,59.4 ; 101.4,60.6 105.7,60.6 ; 101.5,52.1 105.9,52.1 ; 101.5,55.8 105.7,55.8 ; 101.5,57 105.7,57 ; 101.5,58.2 105.7,58.2 ; 106.8,52 106.8,60.9

## Polygon pours and split planes (outlines as drawn)
"VCC 3.3V" on Top "Top-No Net" (solid, pour order 6): 28,26.878 28.093,27 37.3,27 37.3,21.5 37.207,21.622 28,21.622 28,27
GND on Top "Top-No Net" (solid, pour order 8): 26.7,21 26.7,35 25.949,35 22.098,30.9 21.347,30.1 8.2,30.1 8.2,21 26.7,21
GND on Bottom "Top-No Net" (solid, pour order 7): 75.44,51.5 64.432,40.013 61.965,40.013 55.797,33.577 48.3,33.577 48.3,21.1 48.49,21.298 107.8,21.298 107.8,51.401 107.705,51.5
GND on Bottom "Top-No Net" (solid, pour order 10): 8.654,33.5 8.745,33.417 42.809,33.417 42.809,21.383 42.9,21.3 42.537,21.632 8.563,21.632 8.563,33.085 8.2,33.417
GND on Bottom "Top-No Net" (solid, pour order 9): 107.9,90.807 8.396,90.807 8.3,90.9 8.3,37.804 31.786,37.804 31.786,35.2 54.889,35.2 62.845,42.918 65.529,42.918 65.529,43.197 76.17,53.519 76.266,53.426 107.804,53.426 107.804,90.621 107.708,90.714
no net on Keep-Out Layer "Top-No Net" (none): 108,90.9 108,21.2 8,21.2 8,90.9